# Altium PCB gps_power.PcbDoc
Units mm, origin at the board's own origin, x right, y up, seen from the top; angles counter-clockwise.
Board outline 26.54 x 18.92 mm, 2 copper layers (Top Layer, Bottom Layer); 10 components, 4 nets, 28 pads, 5 vias.
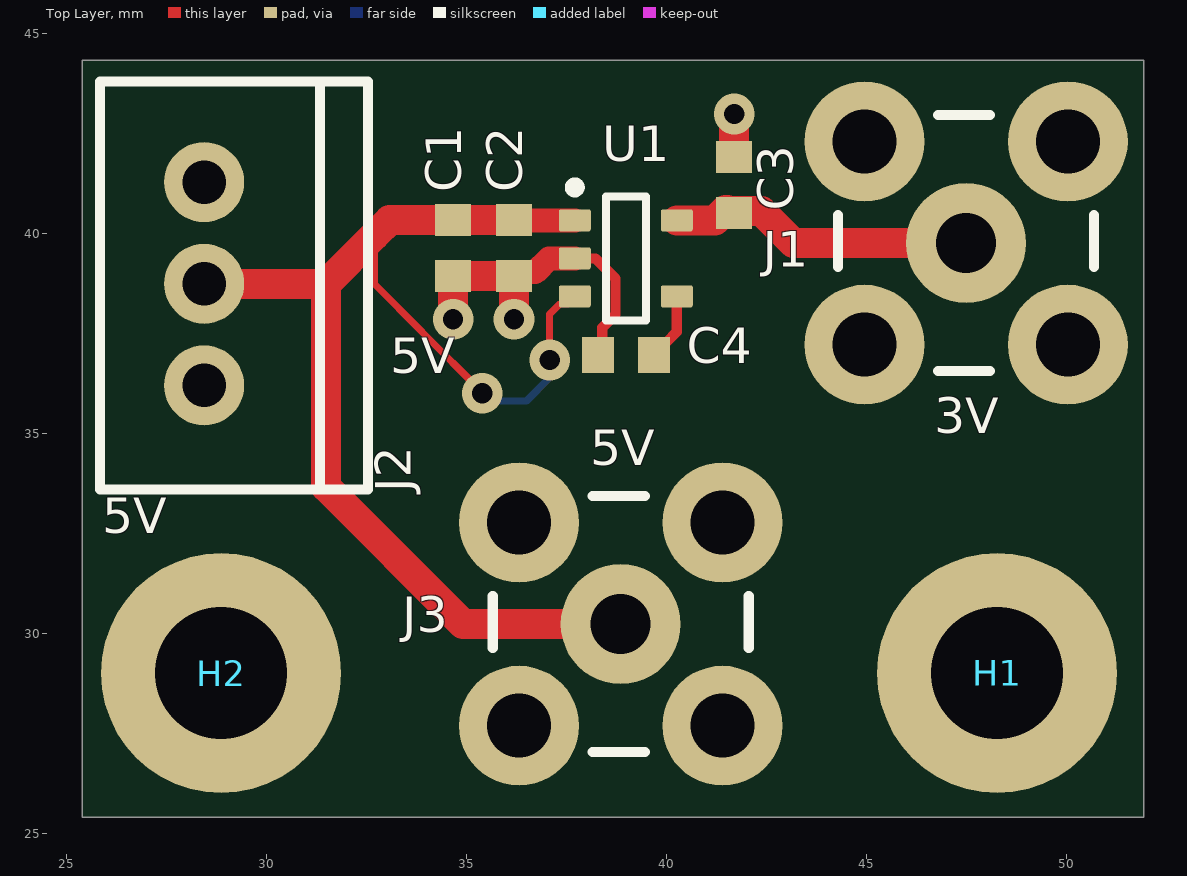
[diagram p0: Top Layer view]
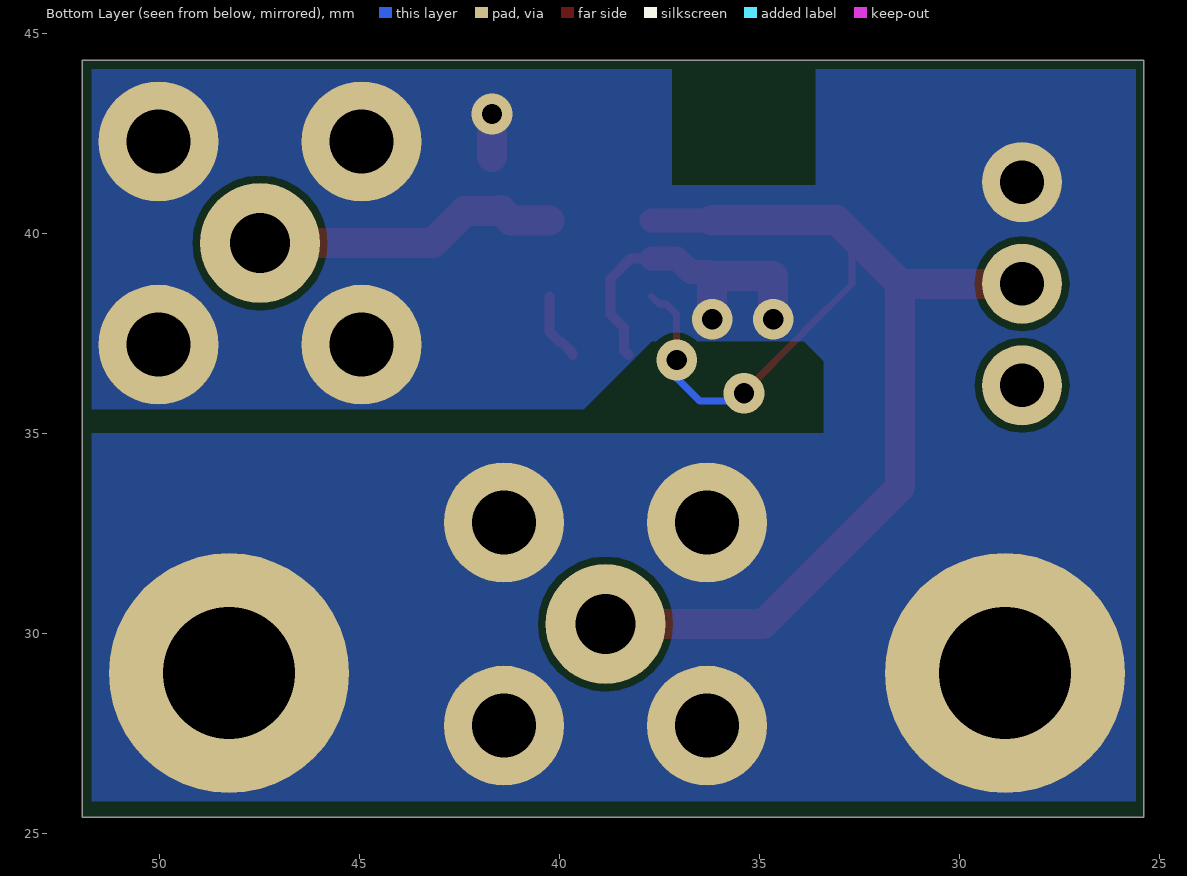
[diagram p1: Bottom Layer view, seen from below]
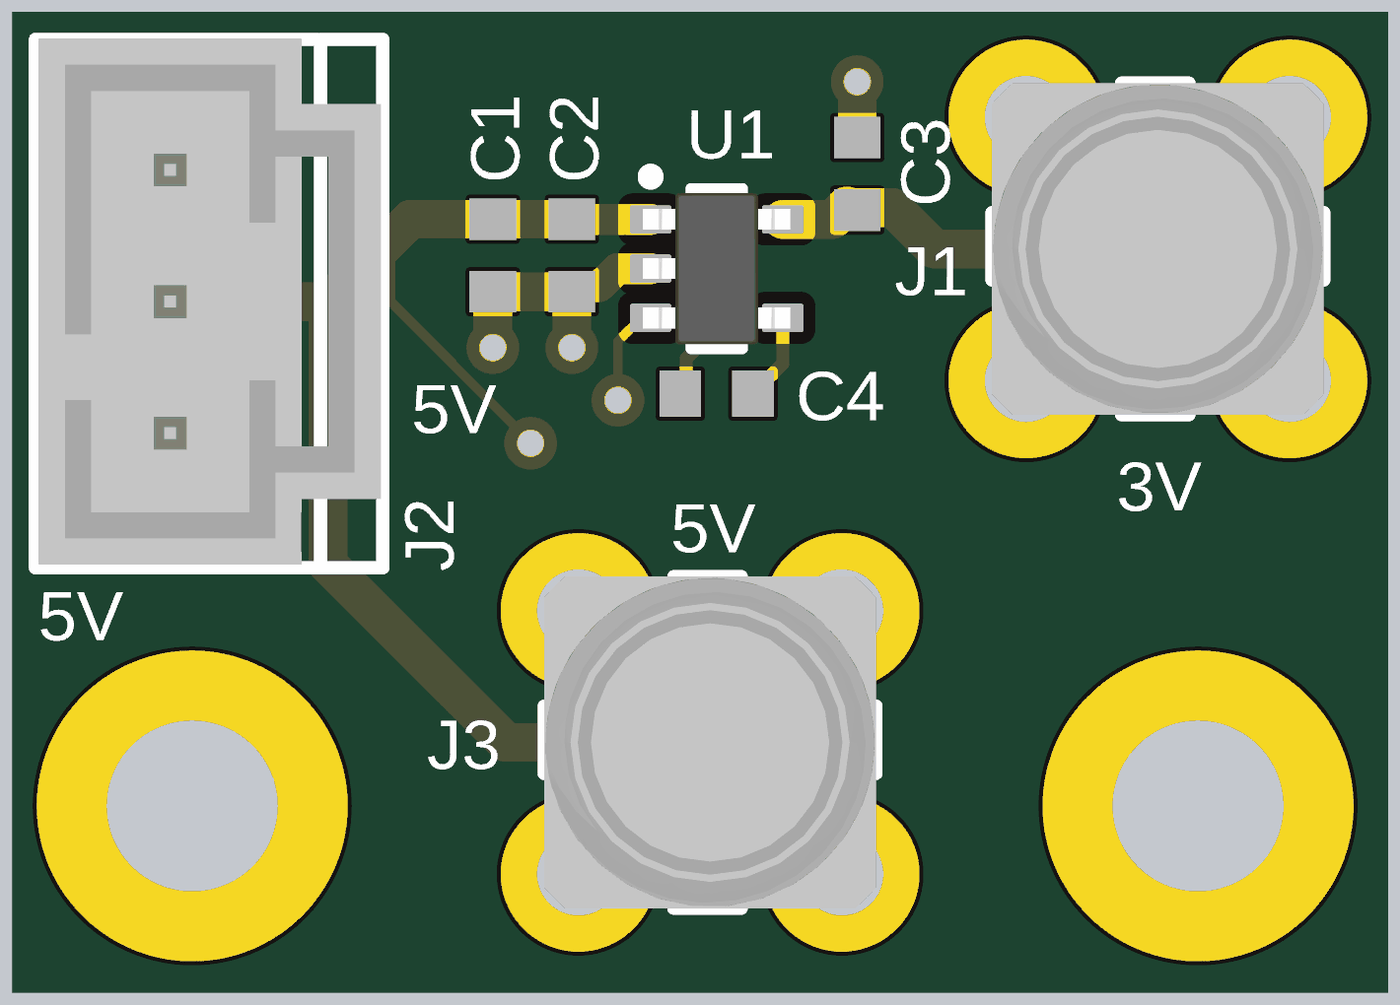
[diagram p2: 3D render of the assembled board from above, using the file's embedded part models]

## Layer stack, top to bottom
Top Solder: solder mask 0.0102, Solder Resist, Dk 3.5
Top Layer: signal copper 0.0356
Dielectric 1: dielectric 0.32, FR-4, Dk 4.8
Bottom Layer: signal copper 0.0356
Bottom Solder: solder mask 0.0102, Solder Resist, Dk 3.5

## Board outline
25.4,25.4 51.943,25.4 51.943,44.323 25.4,44.323

## Design rules (kind name [scope] priority, off if disabled: settings)
Clearance "Clearance~Sunstone Circuits" [All] p1: gap=0.178 ignorepadtopadclearanceinfootprint=FALSE except(0: Arc-Hole Track-Hole SMDPad-Hole THPad-Hole Via-Hole Fill-Hole Poly-Hole Region-Hole Text-Hole) // Sunstone Circuits Minimum Clearance Rule (Double Sided)
HoleSize "HoleSize~Sunstone Circuits" [All] p1: absolutevalues=TRUE maxlimit=6.375 minlimit=0.508 maxpercent=80.000 minpercent=20.000 // SSC Hole Size Rule For Single Sided & Double Sided Designs.
HoleSize Testpoint [All] p2: absolutevalues=TRUE maxlimit=2.54 minlimit=0.025 maxpercent=80.000 minpercent=20.000
HoleSize TestPointUsage [All] p3: absolutevalues=TRUE maxlimit=2.54 minlimit=0.025 maxpercent=80.000 minpercent=20.000
MinimumAnnularRing "MinimumAnnularRing~Sunstone Circuits" [All] p1: minimumring=0.178 // Sunstone Circuits Minimum Annular Ring (Double Sided)
PlaneClearance "PlaneClearance~Sunstone Circuits" [All] p1: clearance=0.305 // Sunstone Circuits Power Plane Clearance Rule (Double Sided)
PlaneConnect "PlaneConnect~Sunstone Circuits" [All] p1: planeconnectstyle=Direct reliefexpansion=0.254 reliefentries=4 reliefconductorwidth=0.203 reliefairgap=0.254 // Sunstone Circuits Power Plane Connect Rule (Double Sided)
PolygonConnect "PolygonConnect~Sunstone Circuits" [All] p1: connectstyle=Direct reliefconductorwidth=0.203 reliefentries=4 polygonreliefangle="90 Angle" airgapwidth=0.254 // Sunstone Circuits Polygon Connect Style (Double Sided)
RoutingVias "RoutingVias~Sunstone Circuits" [All] p1: holewidth=0.508 width=1.016 viastyle="Through Hole" minholewidth=0.508 minwidth=1.016 maxholewidth=1.016 maxwidth=2.032 // Sunstone Circuits Routing Vias Rule (Double Sided)
ShortCircuit "ShortCircuit~Sunstone Circuits" [All] p1: allowed=FALSE // Sunstone Circuits Short Circuit Rule~Do Not Allow (Double Sided)
SilkToSolderMaskClearance [IsPad] p1 off: minsilkscreentomaskgap=0.254 clearancetoexposedcopper=TRUE
SolderMaskExpansion "SolderMaskExpansion~Sunstone Circuits" [All] p1: expansion=0.076 // Sunstone Circuits Solder Mask Expansion Rule (Double Sided)
ViasUnderSMD "ViasUnderSMD~Sunstone Circuits" [All] p1: allowed=FALSE // Sunstone Circuits Vias Under SMD~Do Not Allow (Double Sided)
Width "Width~Sunstone Circuits" [All] p1: maxlimit=2.54 minlimit=0.178 preferedwidth=0.254 // Sunstone Circuits Minimum Width Rule (Double Sided)
25 further rules are at their usual default settings.

## Components (designator, comment, footprint, x,y, rotation, side; value= is the part's Value field where it differs from the comment)
C1 "Cap Semi" 1608[0603] 34.671,39.624 r90 top value=10uF
C2 "Cap Semi" 1608[0603] 36.195,39.624 r90 top value=0.1uF
C3 "Cap Semi" 1608[0603] 41.7,41.2 r270 top value=1uF
C4 "Cap Semi" 1608[0603] 38.989,36.957 r0 top value=0.01uF
H1 "Mounting hole" "M3 hole" 48.4,29 r0 top
H2 "Mounting hole" "M3 hole" 29,29 r0 top
J1 "5-1814832-1" 5-1814832-1 47.498,39.751 r0 top
J2 "0705430002" 0705430002 28.448,36.195 r90 top
J3 "5-1814832-1" 5-1814832-1 38.862,30.226 r0 top
U1 "TPS79230DBVR" DBV0005A_L 38.989,39.37 r0 top

## Footprints (in the part's own frame and the unit in brackets; to place one, negate y for a bottom-side part, rotate by r counter-clockwise, add the part's x,y. Pads: shape width x height; smd on the part's side, far side on the other; paste and mask are expansions set on the pad)
5-1814832-1 [mm] "SMA Connector PCB Through-hole"
  round 3 hole 1.6: G1(-2.54,2.54) G2(2.54,2.54) G3(-2.54,-2.54) G4(2.54,-2.54)
  round 3 hole 1.5: P(0,0)
  silkscreen extent -3.2,-3.2 3.2,3.2, body extent -3.2,-3.2 3.2,3.2, height 9.51
1608[0603] [mm] "Chip Capacitor, Body 1.6x0.8mm, IPC High Density"
  rect 0.8x0.9 smd: 1(-0.7,0) 2(0.7,0)
  body extent -0.87,-0.48 0.87,0.48, height 1.3
0705430002 [mm] "CONN HEADER VERT 3POS 2.54MM"
  round 2 hole 1.09: 1(0,0) 2(2.54,0) 3(5.08,0)
  silkscreen extent -2.6,-4.1 7.6,2.6, body extent -2.54,-4.06 7.62,2.54, height 11.81
DBV0005A_L [mm] "SOT23, 5-Leads, Body 3.05x1.75mm, Pitch 0.95mm, IPC High Density"
  rrect18% 0.8x0.55 smd mask+0.229: 1(-1.275,0.95) 2(-1.275,0) 3(-1.275,-0.95) 4(1.275,-0.95) 5(1.275,0.95)
  silkscreen extent -1.4,-1.55 0.5,1.9, body extent -1.42,-1.46 1.42,1.46, height 1.08
"M3 hole" [mm] "M3 hole"
  round 6 hole 3.3: 1(-0.127,0)

## Part data
C1 C3: "Capacitor (Semiconductor SIM Model)", Capacitance=1uF, Case/Package=0603, Case Code (Metric)=1608, Dielectric=X7R, Manufacturer=Samsung, Manufacturer Part Number=CL10B105KP8NNNC, Max Operating Temperature=125°C, Min Operating Temperature=-55°C, Package Quantity=1, Supplier Part Number 1=1276-1946-1-ND, Tolerance=10%, Voltage Rating=10V, Case Code (Imperial)=0603, ComponentLink1Description=https://datasheet.ciiva.com/25788/cl10b105kp8nnnc-25788304.pdf?src-supplier=Digi-Key, ComponentLink1URL=https://datasheet.ciiva.com/25788/cl10b105kp8nnnc-25788304.pdf?src-supplier=Digi-Key, ComponentLink2Description=https://datasheet.ciiva.com/16396/cl10b105kp8nnnc-16396970.pdf?src-supplier=Future+Electronics, ComponentLink2URL=https://datasheet.ciiva.com/16396/cl10b105kp8nnnc-16396970.pdf?src-supplier=Future+Electronics, ComponentLink3Description=https://datasheet.ciiva.com/26838/getdatasheetpartid-358410-26838426.pdf?src-supplier=Verical, ComponentLink3URL=https://datasheet.ciiva.com/26838/getdatasheetpartid-358410-26838426.pdf?src-supplier=Verical, Contact Plating=Tin, Depth=0.8mm, Height=0.8mm, LatestRevisionDate=29-May-2009, LatestRevisionNote="IPC-7351 Footprint Added.", Lead Free="Lead Free", Length=1.6mm, Mount="Surface Mount", PackageDescription="Chip Capacitor", PackageReference=C1206, Packaging="Tape and Reel", Published=8-Jun-2000, Publisher="Altium Limited", Radiation Hardening=No, RoHS=Yes, Stock 1=10370961, Supplier 1=Digi-Key, Thickness=0.035inch, Voltage Rating (DC)=10V, Width=0.031inch
C2: "Capacitor (Semiconductor SIM Model)", Capacitance=100nF, Case/Package=0603, Case Code (Metric)=1608, Dielectric=X7R, Insulation Resistance=100GR, Manufacturer=Yageo, Manufacturer Part Number=CC0603KRX7R7BB104, Max Operating Temperature=125°C, Min Operating Temperature=-55°C, Package Quantity=1, Supplier Part Number 1=311-1088-1-ND, Tolerance=10%, Voltage=16V, Case Code (Imperial)=0603, ComponentLink1Description=https://datasheet.ciiva.com/144/mlccorderingcode-144182.pdf?src-supplier=Digi-Key, ComponentLink1URL=https://datasheet.ciiva.com/144/mlccorderingcode-144182.pdf?src-supplier=Digi-Key, ComponentLink2Description=https://datasheet.ciiva.com/16625/upy-gphc-x7r-6-3v-to-50v-8-16625526.pdf?src-supplier=Avnet+Europe, ComponentLink2URL=https://datasheet.ciiva.com/16625/upy-gphc-x7r-6-3v-to-50v-8-16625526.pdf?src-supplier=Avnet+Europe, ComponentLink3Description=https://datasheet.ciiva.com/8033/70765-8033799.pdf?src-supplier=Element14, ComponentLink3URL=https://datasheet.ciiva.com/8033/70765-8033799.pdf?src-supplier=Element14, ComponentLink4Description=https://datasheet.ciiva.com/15165/getdatasheetpartid-63554-15165387.pdf?src-supplier=Verical, ComponentLink4URL=https://datasheet.ciiva.com/15165/getdatasheetpartid-63554-15165387.pdf?src-supplier=Verical, ComponentLink5Description=https://datasheet.ciiva.com/7978/1489800-7978141.pdf?src-supplier=Element14, ComponentLink5URL=https://datasheet.ciiva.com/7978/1489800-7978141.pdf?src-supplier=Element14, ComponentLink6Description=https://datasheet.ciiva.com/8033/1734573-8033797.pdf?src-supplier=Element14, ComponentLink6URL=https://datasheet.ciiva.com/8033/1734573-8033797.pdf?src-supplier=Element14, ComponentLink7Description=https://datasheet.ciiva.com/144/mlccorderingcode-144183.pdf?src-supplier=Digi-Key, ComponentLink7URL=https://datasheet.ciiva.com/144/mlccorderingcode-144183.pdf?src-supplier=Digi-Key, ComponentLink8Description=https://datasheet.ciiva.com/144/mlccorderingcode-144184.pdf?src-supplier=Digi-Key, ComponentLink8URL=https://datasheet.ciiva.com/144/mlccorderingcode-144184.pdf?src-supplier=Digi-Key, ComponentLink9Description=https://datasheet.ciiva.com/28450/1489800-28450552.pdf?src-supplier=Element14, ComponentLink9URL=https://datasheet.ciiva.com/28450/1489800-28450552.pdf?src-supplier=Element14, ComponentLink10Description=https://datasheet.ciiva.com/13395/upy-gphc-x7r-6-3v-to-50v-8-13395674.pdf?src-supplier=Mouser, ComponentLink10URL=https://datasheet.ciiva.com/13395/upy-gphc-x7r-6-3v-to-50v-8-13395674.pdf?src-supplier=Mouser, ComponentLink11Description=https://datasheet.ciiva.com/46430/1734573-46430156.pdf?src-supplier=Element14, ComponentLink11URL=https://datasheet.ciiva.com/46430/1734573-46430156.pdf?src-supplier=Element14, Composition=Ceramic, Depth=0.8mm, Halogen Free="Halogen Free", Height=0.8mm, LatestRevisionDate=29-May-2009, LatestRevisionNote="IPC-7351 Footprint Added.", Lead Free="Lead Free", Length=1.6mm, Material=Ceramic, Mount="Surface Mount", Number of Pins=2, PackageDescription="Chip Capacitor", PackageReference=C1206, Packaging="Tape and Reel", Published=8-Jun-2000, Publisher="Altium Limited", Radiation Hardening=No, REACH SVHC="No SVHC", RoHS=Yes, Stock 1=18235990, Supplier 1=Digi-Key, Termination=SMD/SMT, Thickness=0.035inch, Voltage Rating=16V, Voltage Rating (DC)=16V, Width=0.031inch
C4: "Capacitor (Semiconductor SIM Model)", Capacitance=10nF, Case/Package=0603, Case Code (Metric)=1608, Dielectric=X7R, Manufacturer=Murata, Manufacturer Part Number=GCM188R72A103KA37D, Max Operating Temperature=125°C, Min Operating Temperature=-55°C, Package Quantity=1, Ratings=AEC-Q200, Supplier Part Number 1=490-4781-1-ND, Tolerance=10%, Voltage=100V, Case Code (Imperial)=0603, ComponentLink1Description=https://datasheet.ciiva.com/16497/product-16497251.pdf?src-supplier=Future+Electronics, ComponentLink1URL=https://datasheet.ciiva.com/16497/product-16497251.pdf?src-supplier=Future+Electronics, ComponentLink2Description=https://datasheet.ciiva.com/132/product-132907.pdf?src-supplier=Digi-Key, ComponentLink2URL=https://datasheet.ciiva.com/132/product-132907.pdf?src-supplier=Digi-Key, ComponentLink3Description=https://datasheet.ciiva.com/18183/getdatasheetpartid-178890-18183651.pdf?src-supplier=Verical, ComponentLink3URL=https://datasheet.ciiva.com/18183/getdatasheetpartid-178890-18183651.pdf?src-supplier=Verical, ComponentLink4Description=https://datasheet.ciiva.com/132/product-132908.pdf?src-supplier=Digi-Key, ComponentLink4URL=https://datasheet.ciiva.com/132/product-132908.pdf?src-supplier=Digi-Key, ComponentLink5Description=https://datasheet.ciiva.com/11786/0900766b80ef92d0-11786108.pdf?src-supplier=RSComponents, ComponentLink5URL=https://datasheet.ciiva.com/11786/0900766b80ef92d0-11786108.pdf?src-supplier=RSComponents, ComponentLink6Description=https://datasheet.ciiva.com/132/product-132909.pdf?src-supplier=Digi-Key, ComponentLink6URL=https://datasheet.ciiva.com/132/product-132909.pdf?src-supplier=Digi-Key, ComponentLink7Description=https://datasheet.ciiva.com/11619/product-11619719.pdf?src-supplier=Avnet, ComponentLink7URL=https://datasheet.ciiva.com/11619/product-11619719.pdf?src-supplier=Avnet, Depth=0.8mm, Height=0.8mm, LatestRevisionDate=29-May-2009, LatestRevisionNote="IPC-7351 Footprint Added.", Lead Free="Lead Free", Length=1.6mm, Mount="Surface Mount", PackageDescription="Chip Capacitor", PackageReference=C1206, Packaging="Tape and Reel", Published=8-Jun-2000, Publisher="Altium Limited", Radiation Hardening=No, REACH SVHC="No SVHC", RoHS=Yes, Stock 1=9017131, Supplier 1=Digi-Key, Termination=SMD/SMT, Thickness=0.035inch, Voltage Rating=100V, Voltage Rating (DC)=100V, Width=0.8mm
H1 H2: library part "Mouting hole", "Mounting Hole"
J1 J3: Case/Package=SMA, Dielectric Material=PTFE, Frequency=3GHz, Insulation Resistance=5GR, Manufacturer="TE Connectivity", Max Operating Temperature=185°C, Min Operating Temperature=-67°C, Package Quantity=1, Supplier Part Number 1=A97594-ND, Body Material=Zinc, Body Plating=Gold, ComponentLink1Description=https://datasheet.ciiva.com/642/eng-cd-1814832-b1-642785.pdf?src-supplier=Digi-Key, ComponentLink1URL=https://datasheet.ciiva.com/642/eng-cd-1814832-b1-642785.pdf?src-supplier=Digi-Key, ComponentLink2Description=https://datasheet.ciiva.com/642/eng-cd-1814832-b1-642785.pdf?src-supplier=Avnet, ComponentLink2URL=https://datasheet.ciiva.com/642/eng-cd-1814832-b1-642785.pdf?src-supplier=Avnet, ComponentLink3Description=https://datasheet.ciiva.com/23783/1663582-23783560.pdf?src-supplier=Newark, ComponentLink3URL=https://datasheet.ciiva.com/23783/1663582-23783560.pdf?src-supplier=Newark, ComponentLink4Description=https://datasheet.ciiva.com/16318/5-1814832-1-16318587.pdf?src-supplier=Future+Electronics, ComponentLink4URL=https://datasheet.ciiva.com/16318/5-1814832-1-16318587.pdf?src-supplier=Future+Electronics, ComponentLink5Description=https://datasheet.ciiva.com/11762/0900766b80a70d0f-11762254.pdf?src-supplier=RSComponents, ComponentLink5URL=https://datasheet.ciiva.com/11762/0900766b80a70d0f-11762254.pdf?src-supplier=RSComponents, ComponentLink6Description=https://datasheet.ciiva.com/26824/getdatasheetpartid-396696-26824822.pdf?src-supplier=Verical, ComponentLink6URL=https://datasheet.ciiva.com/26824/getdatasheetpartid-396696-26824822.pdf?src-supplier=Verical, ComponentLink7Description=https://datasheet.ciiva.com/30201/eng-cd-1814832-a-30201302.pdf?src-supplier=Onlinecomponents.com, ComponentLink7URL=https://datasheet.ciiva.com/30201/eng-cd-1814832-a-30201302.pdf?src-supplier=Onlinecomponents.com, ComponentLink8Description=https://datasheet.ciiva.com/25908/eng-cd-1814832-a-25908583.pdf?src-supplier=Avnet+Europe, ComponentLink8URL=https://datasheet.ciiva.com/25908/eng-cd-1814832-a-25908583.pdf?src-supplier=Avnet+Europe, ComponentLink9Description=https://datasheet.ciiva.com/16469/eng-cd-1814832-a-16469256.pdf?src-supplier=Avnet+Asia, ComponentLink9URL=https://datasheet.ciiva.com/16469/eng-cd-1814832-a-16469256.pdf?src-supplier=Avnet+Asia, Connector System=Cable-to-Board, Connector Type=SMA, Contact Material=Bronze, Contact Plating=Gold, Depth=6.4mm, ELV=Compliant, Fastening Type=Threaded, Gender=Female, Impedance=50R, Insulation Material=Polytetrafluoroethylene, Lead Free="Lead Free", Length=0.532inch, Manufacturer Part Number=5-1814832-1, Max Frequency=3GHz, Mount="Through Hole", Number of Positions=1, Orientation=Straight, Packaging=Box, Plating=Nickel, Polarity=Normal, Pricing 1="1 = 1.99000, 10 = 1.80400, 25 = 1.69360, 50 = 1.62000, 100 = 1.54640, 250 = 1.39908, 500 = 1.28864, 1000 = 1.10454 (USD)", Radiation Hardening=No, REACH SVHC="No SVHC", RoHS=Yes, Sealable="No (Without)", Stock 1=34232, Supplier 1=Digi-Key, Tail Length=4mm, Termination="Through Hole", Wire/Cable Type=Coaxial
J2: Color=Black, Contact Resistance=30mR, Current Rating=3A, Flammability Rating="UL94 V-0", Manufacturer=Molex, Manufacturer Part Number=70543-0002, Max Operating Temperature=105°C, Max Voltage Rating (AC)=250V, Min Operating Temperature=-40°C, Package Quantity=2496, Supplier Part Number 1=WM4801-ND, Approvals=UL, ComponentLink1Description=https://datasheet.ciiva.com/11747/0900766b80d8d64b-11747399.pdf?src-supplier=RSComponents, ComponentLink1URL=https://datasheet.ciiva.com/11747/0900766b80d8d64b-11747399.pdf?src-supplier=RSComponents, ComponentLink2Description=https://datasheet.ciiva.com/30061/97290705430002-pcb-headers-30061900.pdf?src-supplier=Onlinecomponents.com, ComponentLink2URL=https://datasheet.ciiva.com/30061/97290705430002-pcb-headers-30061900.pdf?src-supplier=Onlinecomponents.com, ComponentLink3Description=https://datasheet.ciiva.com/19462/884643-19462365.pdf?src-supplier=Jameco, ComponentLink3URL=https://datasheet.ciiva.com/19462/884643-19462365.pdf?src-supplier=Jameco, ComponentLink4Description=https://datasheet.ciiva.com/5150/0705430002-pcb-headers-172733-5150622.pdf?src-supplier=Mouser, ComponentLink4URL=https://datasheet.ciiva.com/5150/0705430002-pcb-headers-172733-5150622.pdf?src-supplier=Mouser, ComponentLink5Description=https://datasheet.ciiva.com/16657/0705430002-pcb-headers-16657766.pdf?src-supplier=Avnet+Europe, ComponentLink5URL=https://datasheet.ciiva.com/16657/0705430002-pcb-headers-16657766.pdf?src-supplier=Avnet+Europe, Contact Material=Bronze, Contact Plating=Gold, Depth=6.6mm, ELV=Compliant, Gender=Male, Glow Wire Compliant=Non-compliant, Height=11.81mm, Housing Color=Black, Housing Material=Thermoplastic, Lead Free="Lead Free", Lead Pitch=2.54mm, Length=10.17mm, Material=Brass, Max Current Rating=3A, Mount="Through Hole", Number of Circuits=3, Number of Contacts=3, Number of Positions=3, Number of Rows=1, Orientation=Vertical, Packaging=Rail/Tube, Pitch=2.54mm, Pricing 1="1 = 0.92000, 10 = 0.80500, 100 = 0.69450, 500 = 0.56826, 2496 = 0.45776, 7488 = 0.44198, 12480 = 0.41041 (USD)", Radiation Hardening=No, REACH SVHC=Unknown, RoHS=Yes, Stock 1=32342, Supplier 1=Digi-Key, Termination=Solder, Voltage Rating=250V, Voltage Rating (DC)=250V
U1: library part CMP-0394-00276-2, "Single Output High PSRR LDO, 100 mA, Fixed 3 V Output, 2.7 to 5.5 V Input, 5-pin SOT-23 (DBV), -40 to 125 degC, Green (RoHS & no Sb/Br)", Case/Package=SOT-23, Dropout Voltage=55mV, Input Bias Current=170uA, Manufacturer="Texas Instruments", Max Input Voltage=5.5V, Max Operating Temperature=125°C, Max Output Current=100mA, Max Output Voltage=3V, Max Power Dissipation=561mW, Min Current Limit=285mA, Min Input Voltage=2.7V, Min Operating Temperature=-40°C, Output Voltage Accuracy=2%, Package Quantity=1, Quiescent Current=200uA, Rating=Catalog, Supplier Part Number 1=296-11871-1-ND, Accuracy=2%, Accuracy(%)=2, Code_JEDEC=MO-178, ComponentLink1Description="Manufacturer URL", ComponentLink1URL=http://www.ti.com/, ComponentLink2Description=Datasheet, ComponentLink2URL=http://www.ti.com/general/docs/lit/getliterature.tsp?genericPartNumber=TPS79230&fileType=pdf, ComponentLink3Description="Package Specification", ComponentLink3URL=http://www.ti.com/litv/pdf/mpds018i, ComponentLink4Description="URL Link1", ComponentLink4URL="Samples URL:http://www.ti.com/product/tps79230#samples", ComponentLink5Description=https://datasheet.ciiva.com/22700/1887683-22700166.pdf?src-supplier=Element14, ComponentLink5URL=https://datasheet.ciiva.com/22700/1887683-22700166.pdf?src-supplier=Element14, DatasheetVersion=SLVS337B, Eco-Plan="Green (RoHS & no Sb/Br)", Fixed Output Options(V)=3, Iout(Max)(A)=0.1, Iq(Typ)(mA)=0.2, Lead Free="Lead Free", Manufacturer Part Number=TPS79230DBVR, Min Output Voltage=3V, Mounting Technology="Surface Mount", Nominal Output Voltage=3V, Number of Outputs=1, Number of Pins=5, Number of Regulators=1, Output Current=100mA, Output Type=Fixed, Output Voltage=3V, PackageDescription="5-Pin Plastic Small Outline, Body 1.60 Ã— 2.90 mm, Pitch 0.95 mm", PackageReference=DBV0005A, PackageVersion=4073253-4/K, Packaging="Tape and Reel", PartNumber=TPS79230DBVR, Polarity=Positive, Power Dissipation=561mW, Radiation Hardening=No, REACH SVHC="No SVHC", RoHS=Yes, Stock 1=4533, SubFamily="Single Channel LDO", Supplier 1=Digi-Key, Vdo(Typ)(mV)=55, Vin(Max)(V)=5.5, Vin(Min)(V)=2.7, Vout Adj(Max)(V)=3, Vout Adj(Min)(V)=3

## Via types
v1: diameter 1.016, hole 0.508, Top Layer to Bottom Layer, tented both sides, 5 vias

## Nets (pads, with @x,y where several pads share a name; then routed paths per layer and width w, separated by ;. In a path a pad name is that pad's centre, name@x,y a point inside that pad or via, vN(x,y) a via of type N, cw(c..) or ccw(c..) an arc to the next point about the centre after c; other vN are vias at no path point)
3V: C3.2 J1.P U1.5 | length 7.7
  Top Layer w0.75: U1.5 41.224,40.32 41.479,40.575 41.529,40.575 41.554,40.55 42.381,40.55 43.18,39.751 J1.P
5V: C1.2 C2.2 J2.2 J3.P U1.1 U1.3 | length 33.5
  Top Layer w0.178: 32.703,39.941 32.703,38.731 33.896,37.537 33.896,37.525 35.4,36.021 v1(35.4,36) ; v1(37.084,36.83) 37.084,37.973 37.345,38.234 37.528,38.234 U1.3
  Top Layer w0.6: C2.2@36.199,40.32 U1.1
  Top Layer w0.75: J2.2 31.496,38.735 ; C2.2@36.199,40.32 C2.2 C1.2 33.085,40.324 32.703,39.941 31.496,38.735 ; J3.P 34.925,30.226 31.496,33.655 31.496,38.735
  Bottom Layer w0.178: v1(35.4,36) 35.4,35.88 35.32,35.8 35.4,35.8 36.5,35.8 37.084,36.384 v1(37.084,36.83)
GND: C1.1 C2.1 C3.1 C4.1 H1.1 H2.1 J1.G1 J1.G2 J1.G3 J1.G4 J2.3 J3.G1 J3.G2 J3.G3 J3.G4 U1.2 | length 9.8
  Top Layer w0.254: U1.2 38.227,39.37 38.735,38.862 38.735,37.973 38.401,37.639 38.401,37.069 C4.1
  Top Layer w0.6: C2.1 36.295,39.024 36.724,39.024 37.07,39.37 U1.2
  Top Layer w0.75: v1(34.671,37.846) 34.671,37.973 C1.1 C2.1 v1(36.195,37.846) ; C3.1 41.7,42.851 v1(41.7,42.978)
NetC4_2: C4.2 U1.4 | length 1.7
  Top Layer w0.254: C4.2 39.689,37.007 39.962,37.28 40.012,37.28 40.264,37.532 U1.4
pads on no net: J2.1

## Polygon pours and split planes (outlines as drawn)
GND on Bottom Layer "GND" (solid, pour order 0): 25.6,44.1 33.6,44.1 33.6,41.2 37.2,41.2 37.2,44.1 51.7,44.1 51.7,35.6 39.4,35.6 37.7,37.3 33.9,37.3 33.4,36.8 33.4,35 51.7,35 51.7,25.8 25.6,25.8

## Silkscreen, mask and mechanical layers (free items; w line width, h text height)
Top Overlay:
  text "5V" at 33.1,36.2 h1.52
  text "3V" at 46.7,34.7 h1.52
  text "5V" at 38.1,33.9 h1.52
  text "5V" at 25.9,32.2 h1.52
Mechanical 1:
  lines w0.254: 25.3,25.4 25.3,44.4 52,44.4 52,25.4 25.3,25.4